# Altium PCB PCB1.PcbDoc (part 2 of 3)
Units mil, origin at the board's own origin, x right, y up, seen from the top; angles counter-clockwise.
Board outline 2700 x 1000 mil, 4 copper layers (L1, L2, L3, L4), stack 61.583 mil thick; 64 components, 73 nets, 299 pads, 158 vias.
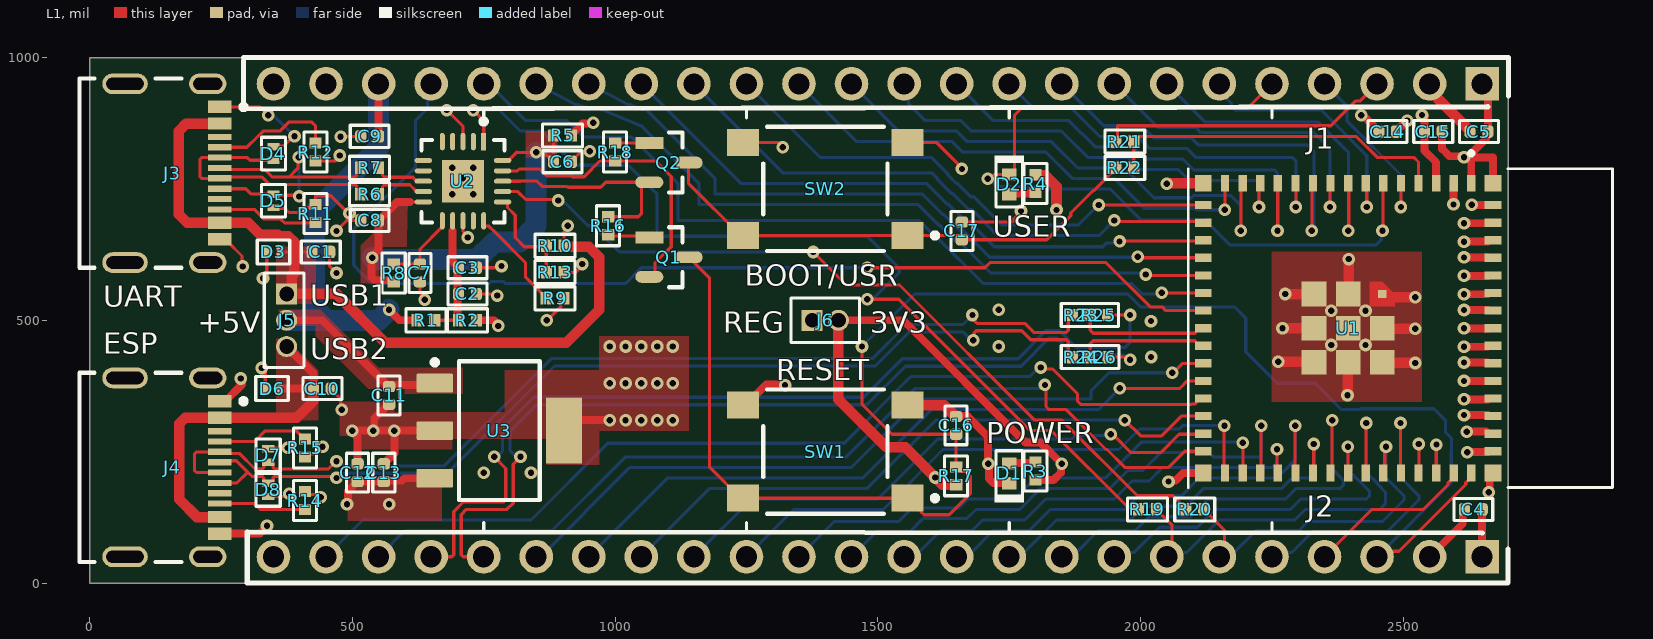
[diagram p0: L1 view]

## Part data (continued)
U3: "IC REG LINEAR 3.3V 1.5A SOT223-4", Case/Package=SOP, Dropout Voltage1-Max=550mV, Dropout Voltage1-Nom=340mV, Input Voltage Absolute-Max=20V, LCSC Part Number=C181262, Manufacturer="Texas Instruments", Min Input Voltage=3.8V, Operating Temperature, TJ-Max=125°C, Operating Temperature, TJ-Min=-40°C, Output Current1-Max=1.5A, Output Voltage1-Max=3.4V, Output Voltage1-Min=3.2V, Output Voltage1-Nom=3.3V, Package Body Material=Plastic, Package Shape=Rectangular, Package Style="SMALL OUTLINEMeter", Peak Reflow Temperature (Cel)=260°C, Supplier Part Number=296-24897-1-ND, Voltage Tolerance-Max=3%, Adjustability=FIXED, Category="Voltage Regulators - Linear", Channels=1, ComponentLink1Description=https://www.ti.com:443/lit/ds/symlink/tl1963a.pdf?src-supplier=IHS+Markit, ComponentLink1URL=https://www.ti.com:443/lit/ds/symlink/tl1963a.pdf?src-supplier=IHS+Markit, ComponentLink2Description=https://datasheet.ciiva.com/2046/-2046068.pdf?src-supplier=Digikey, ComponentLink2URL=https://datasheet.ciiva.com/2046/-2046068.pdf?src-supplier=Digikey, Height - Seated (Max)=1.8mm, JESD-30 Code=R-PDSO-G4, JESD-609 Code=e3, Length=6.5mm, Line Regulation-Max=0.01%, Load Regulation-Max=0.07%, Manufacturer Part Number=TL1963A-33DCYR, Max Supply Voltage=20V, Moisture Sensitivity Level=2, Number of Outputs=1, Packaging="Tape and Reel", Pins=4, Pricing="1=2.91, 10=2.614, 25=2.4712, 100=2.1417, 250=2.03188, 500=1.8232, 1000=1.53764 (USD)", Qualification Status="Not Qualified", Reach SVHC Compliant=Yes, Regulator Type="FIXED POSITIVE SINGLE OUTPUT LDO REGULATOR", RoHS=Yes, RoHS Compliant=Yes, Stock=4105, Supplier=Digikey, Surface Mount=Yes, Technology=BIPOLAR, Terminal Finish=Tin, Terminal Form="Gull Wing", Terminal Pitch=2.3mm, Terminal Position=DUAL, Width=3.5mm

## Via types
v1: diameter 24, hole 12, L1 to L4, tented both sides, 156 vias
v2: diameter 24/24/24 (per signal layer), hole 12, L1 to L4, tented both sides, 2 vias

## Nets (pads, with @x,y where several pads share a name; then routed paths per layer and width w, separated by ;. In a path a pad name is that pad's centre, name@x,y a point inside that pad or via, vN(x,y) a via of type N, cw(c..) or ccw(c..) an arc to the next point about the centre after c; other vN are vias at no path point)
+3V3: C4.2 C5.2 C14.2 C15.2 J1.2 J2.1 J6.2 R2.1 R3.2 R4.2 R5.1 R17.2 U1.3 | length 5478.4
  L1 w15: R2.1@736.14,500 770,500 v1@780,490 ; R5.1@917.01,851.65 917.01,852.83 938.31,874.13 956.7,874.13 v1(958.43,875.85) ; J6.2@1425,500 1548.18,500 1780.68,267.5 1809.69,267.5 1850,227.19 v1(1850,227) 1848.28,225.28 1848.28,209.95 1834.31,195.98 R3.2@1800,195.98 ; C14.2@2486.93,858.98 2486.93,860.16 2506.77,880 v1(2507.5,880) ; v1@2540,890 C15.2@2540,858.98 2540,822.91 2562.36,800.55 U1.3@2562.36,760.55 ; J2.1@2650,50 C4.2@2650,140
  L1 w20: J6.2@1425,500 1425,349.64 1516.57,258.07 1551.93,258.07 1623.07,186.93 R17.2@1648.98,186.93 ; R4.2@1800,777.01 1800.63,776.38 1817.34,776.38 1840,753.72 v1(1840,710) ; J1.2@2550,950 2558.42,941.58 2558.42,928.67 2626.93,860.16 C5.2@2626.93,858.98
  L2 w15: 2536.2,862.78 2560,838.98 2560,430 2585.93,404.07 2585.93,282.22 2591.21,276.94 2591.21,276.18 2592.46,274.94 2592.46,251.26 2592.38,251.18 2592.38,195.9 2648.28,140 2648.28,51.72 J2.1@2650,50
  L2 w20: v1(1850,227) 1850,490 1840,500 v1(1840,710) 1840,776.38 1879.47,815.85 1879.47,830 ; v1(2535.43,890.43) 2536.2,889.67 2536.2,862.78
  L2 w40: v1(777.69,489.24) 825.89,537.44 825.89,675.7 820,681.59 802,699.59 802,837.86 820,855.86 844.14,880 954.28,880 v1(958.43,875.85) 1184.15,875.85 1350,710 1500,710 1620,830 1879.47,830 2457.5,830 v1(2507.5,880) 2517.93,890.43 v1(2535.43,890.43) 2545.41,900.41 2545.41,945.41 J1.2@2550,950
  other v1: 1609.09,200.91
+3V3_FTDI: C6.2 C8.2 R5.2 R8.1 U2.10 U2.20 | length 890.4
  L1 w6: 609.91,725.22 U2.10@635.22,725.22 ; U2.20@797.57,804.18 813,819.61 813.47,819.14 849.53,819.14 v1(850,819.61) 853.44,816.17 868.23,816.17 881.91,802.49 C6.2@882.99,802.49 ; C6.2@882.99,801.65 R5.2@882.99,851.65
  L1 w15: v1@535.96,617.52 v1(537.69,619.24) 537.69,621.67 550,633.99 C8.2@550,690 550,691.18 553.13,694.31 554.31,694.31 585.22,725.22 609.91,725.22 ; v1@536.83,618.38 536.83,582.07 542.85,576.04 575.61,576.04 R8.1@578.74,572.91
  L4 w40: v1(537.69,619.24) 541.5,615.43 736.8,615.43 770.38,649 819,649 850,680 v1(850,819.61)
+3V3_REG: C12.2 C13.2 J6.1 U3.3 | length 1234.6
  L1 w15: v1(490,150) 491.72,151.72 491.72,174.79 505.69,188.76 505.69,189.94 508.82,193.07 C12.2@510,193.07 C13.2@560,193.07 561.18,193.07 C13.2@564.31,189.94 ; C13.2@561.9,194.97 594.31,194.97 598.79,199.45 U3.3@656.97,199.45
  L2 w40: 1329.31,455.77 1373.54,500 J6.1@1375,500
  L2 w60: v1(490,150) v1(570,150) 1023.54,150 1329.31,455.77
+5V: C9.2 C11.2 J1.22 J5.2 R1.1 U3.1 | length 1211.8
  L1 w15: J5.2@375,500 442.68,500 568.82,373.86 C11.2@570,373.86 573.13,376.99 653.41,376.99 U3.1@656.97,380.55 ; C9.2@550,850 J1.22@550,950 ; v1(570,520) 590,500 R1.1@622.99,500
  L4 w40: J5.2@375,500 451.43,500 ; J1.22@550,950 550,827.8 428,705.8 428,523.43 451.43,500 ; v1(570,520) 550,500 451.43,500
+5V_VBUS1: C1.2 D3.2 J3.A4B9 J3.B4A9 J5.1 R10.2 | length 1526.1
  L1 w6: D3.2@362.8,630 390,630 C1.2@423.07,630 ; R10.2@902.99,641.65 902.99,669.2 910,676.21 v1(910,680)
  L1 w20: J3.A4B9@247.64,874.41 184.41,874.41 170,860 170,701.72 186.28,685.43 J3.B4A9@247.64,685.43 302.09,685.43 325.09,662.43 358.58,662.43 361.01,660 378.28,660 390,648.28 390,630 390,590 385,585 385,560 J5.1@375,550 385,550 470,550 562.76,457.24 907.24,457.24 970,520 970,620 950.16,639.84 903.62,639.84 902.99,640.47 R10.2@902.99,641.65
+5V_VBUS2: C10.2 D6.2 J4.A4B9 J4.B4A9 J5.3 | length 699.2
  L1 w15: D6.2@360,370 C10.2@426.14,370 426.14,398.86 J5.3@375,450
  L1 w20: J4.B4A9@247.64,125.59 204.41,125.59 170.57,159.43 170.57,302.85 182.29,314.57 J4.A4B9@247.64,314.57 394.57,314.57 425.51,345.51 425.51,369.37 C10.2@426.14,370
+VCC_FTDI: C2.2 C3.2 R1.2 R2.2 U2.12 | length 218
  L1 w6: R1.2@657.01,500 698.74,500 R2.2@700.47,501.73
  L1 w15: 690.94,670.09 690.86,670 690.86,650 690.86,612.53 702.2,601.18 C3.2@702.2,600 700.47,598.27 700.47,550 R2.2@700.47,501.73
BTN_GPIO0: C17.2 Q2.3 R22.1 SW2.1 SW2.2 | length 957.7
  L1 w6: Q2.3@1140,800 1140,760 1238.58,661.42 SW2.2@1243.5,661.42 SW2.1@1556.5,661.42 1650.13,661.42 1658.48,653.07 C17.2@1660,653.07 1821.25,653.07 1867,698.82 1867,704.01 1909.4,746.41 1910.59,746.41 1952.99,788.82 R22.1@1952.99,790
CHIP_PU: C16.2 J2.3 Q1.3 R17.1 SW1.1 SW1.2 U1.45 | length 3276.4
  L1 w6: Q1.3@1140,620 1180,580 1180,220 1238.58,161.42 SW1.2@1243.5,161.42 1561.42,161.42 1582.01,140.83 1582.01,135.91 1587.91,130 1635.7,130 1675.79,170.09 1675.79,203.77 1667,212.56 1658.54,212.56 1650.16,220.94 R17.1@1648.98,220.94 C16.2@1648.98,283.07 1526.93,283.07 1470,340 v1(1470,450) ; J2.3@2450,50 2460.33,60.33 2491.62,60.33 2618.7,187.41 2618.7,190.91 2629.29,201.5 U1.45@2629.29,209.37
  L4 w6: v1(1470,450) 1570,550 1975.36,550 1999.93,525.43 2178.71,525.43 2200,504.14 2200,440 2259.92,380.08 2332.24,380.08 2382.16,330.15 2416.97,330.15 2418.38,331.57 2558.43,331.57 2580,310 2580,287.32 2591.57,275.75 2591.57,253.38 2591.23,253.04 2591.23,191.23 J2.3@2450,50
CON1_USB_N: D4.2 J3.A7 J3.B7 R6.1 | length 502.5
  L1 w6: D4.2@350,804.41 305.3,804.41 300.26,809.45 J3.B7@247.64,809.45 213.51,809.45 210,805.93 210,773.59 213.51,770.08 J3.A7@247.64,770.08 250.48,772.92 327.43,772.92 341.72,758.64 504.84,758.64 508.35,755.12 508.35,747.63 R6.1@515.98,740
CON1_USB_P: D5.2 J3.A6 J3.B6 R7.1 | length 563.1
  L1 w6: J3.B6@247.64,750.39 297.58,750.39 307.98,740 D5.2@350,740 352.18,737.82 396.65,737.82 v1(398.83,735.64) ; J3.A6@247.64,789.76 250.48,786.92 333.23,786.92 347.51,772.64 380,772.64 ; v1(398.19,810) 396.36,808.17 396.36,789 380,772.64 ; R7.1@515.98,790 508.35,782.37 508.35,776.15 504.84,772.64 380,772.64
  L4 w6: v1(398.19,810) 398.51,809.68 398.51,735.96 v1(398.83,735.64)
CON2_USB_N: D7.2 J4.A7 J4.B7 R23.1 | length 1956.9
  L1 w6: J4.A7@247.64,210.24 203.51,210.24 200,213.75 200,246.09 203.51,249.61 J4.B7@247.64,249.61 250.48,246.76 285.07,246.76 314.84,217 328.3,217 331.81,220.51 331.81,226.11 335.7,230 D7.2@340,230 344.92,230 348.81,226.11 348.81,220.51 352.33,217 454.47,217 469.47,232 v1(470,232) ; v1(1680,510) 1680,505.13 1685.21,499.92 1685.21,497.51 1688.73,494 1779.81,494 1796.81,477 1858.86,477 1862.37,480.51 1862.37,502.37 R23.1@1870,510
  L4 w6: v1(470,232) 473.51,232 482.51,223 674.9,223 878.9,427 1489.53,427 1554.53,492 1662,492 v1(1680,510)
CON2_USB_P: D8.2 J4.A6 J4.B6 R24.1 | length 1890.9
  L1 w6: J4.A6@244.73,227.02 250.48,232.76 279.28,232.76 301.02,211.02 ; J4.B6@247.64,190.55 280.55,190.55 301.02,211.02 ; v1(470,200) 467,203 352.33,203 348.81,199.49 348.81,193.89 344.92,190 D8.2@340,190 335.7,190 331.81,193.89 331.81,199.49 328.3,203 309.04,203 301.02,211.02 ; v1(1681.82,461.82) 1683.44,463.44 1683.44,476.49 1686.96,480 1774.01,480 1791.01,463 1858.86,463 1862.37,459.49 1862.37,437.63 R24.1@1870,430
  L4 w6: v1(470,200) 473.51,200 482.51,209 680.7,209 884.7,413 1495.33,413 1560.33,478 1662,478 1678.18,461.82 v1(1681.82,461.82)
CON_ESP_USB_N: J2.21 R25.1 | length 1773.8
  L1 w6.2: J2.21@650,50 689.27,50 692.9,53.63 692.9,135.88 711.22,154.2 788.41,154.2 792.04,157.83 792.04,217.96 v1(770,240) ; R25.1@1937.01,510 v1(1980,510)
  L4 w6.2: v1(770,240) 774.82,240 781.62,246.8 782.17,246.8 785.8,250.43 785.8,294.16 845,353.36 1473.28,353.36 1546.82,426.9 1766.82,426.9 1820.52,480.6 1845.45,480.6 1877.95,448.1 1969.72,448.1 1980,458.38 v1(1980,510)